# Altium PCB TwoLayer.PcbDoc
Units mm, origin at the board's own origin, x right, y up, seen from the top; angles counter-clockwise.
Board outline 130 x 170 mm, 2 copper layers (Top Layer, Bottom Layer), stack 1.07 mm thick; 24 components, 16 nets, 100 pads, 0 vias.
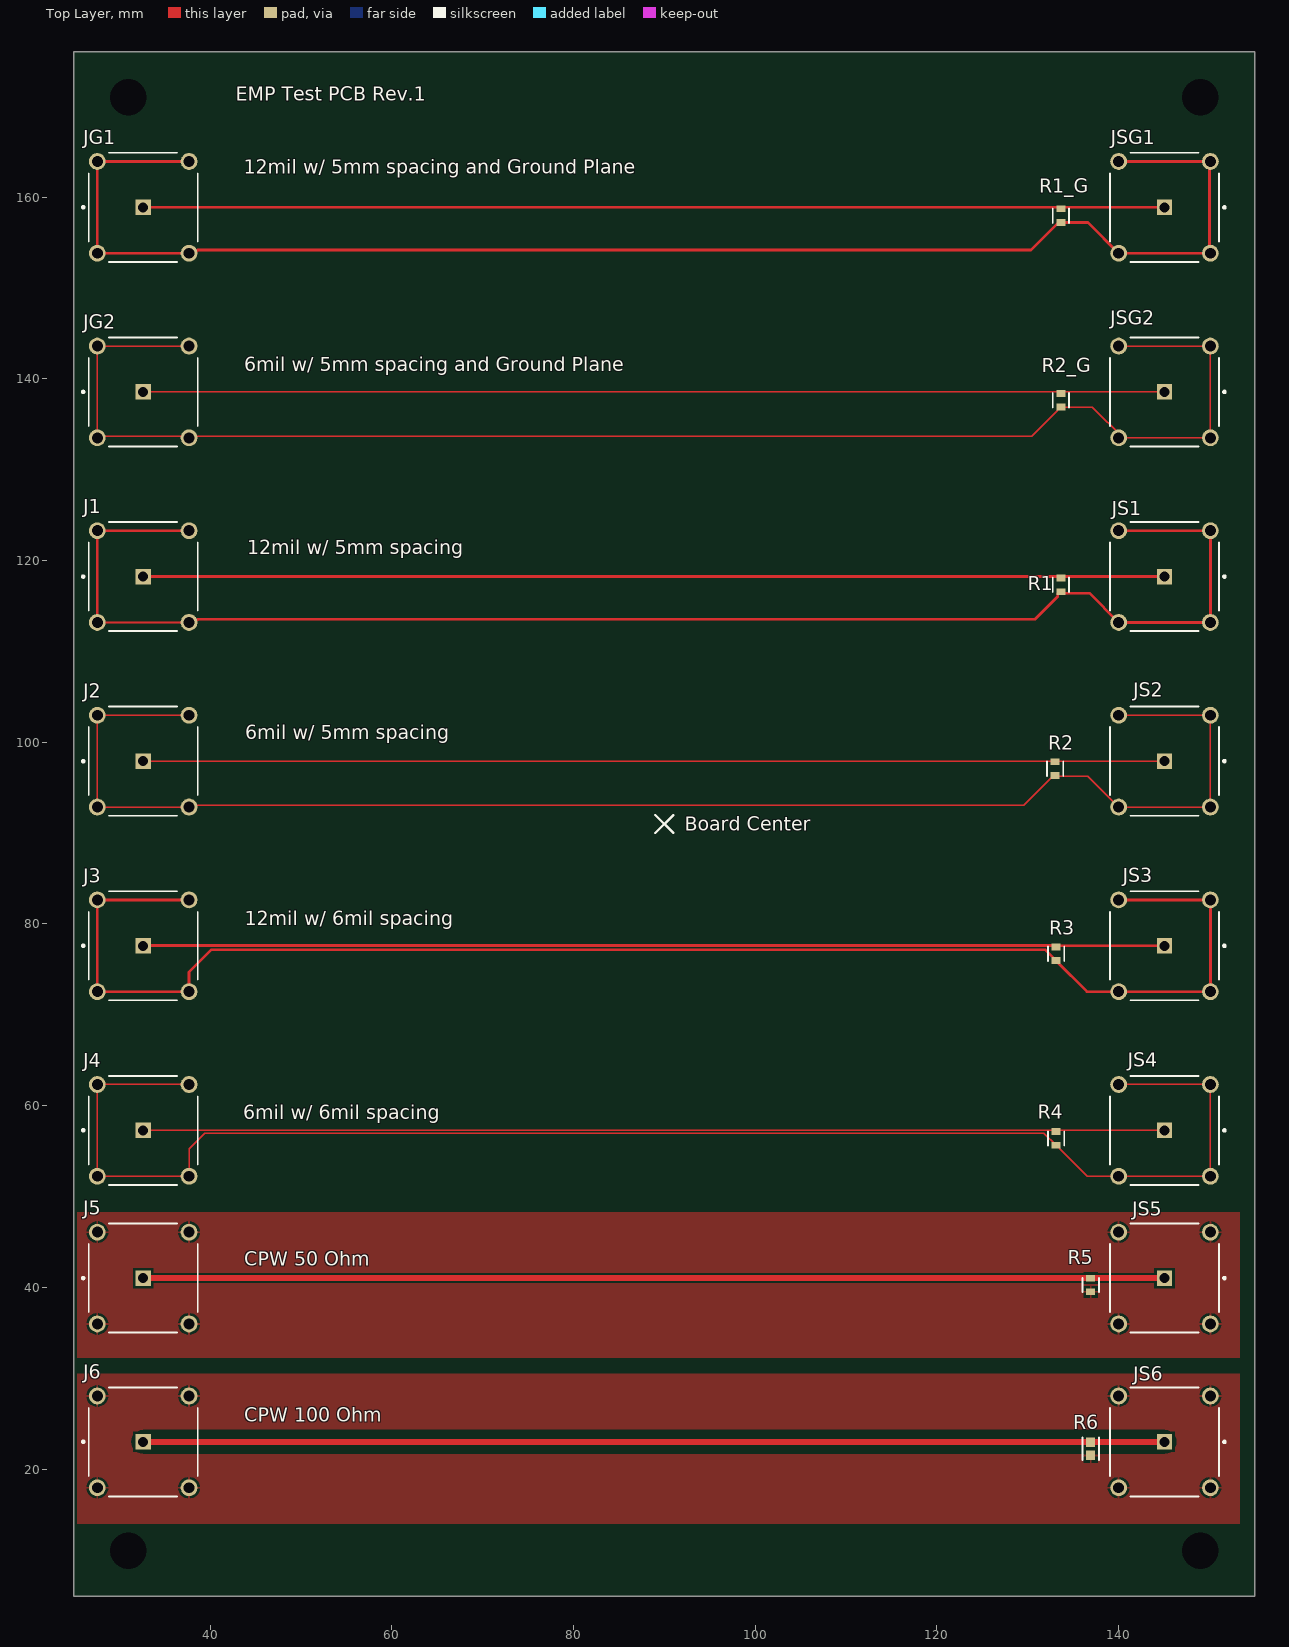
[diagram p0: Top Layer view]
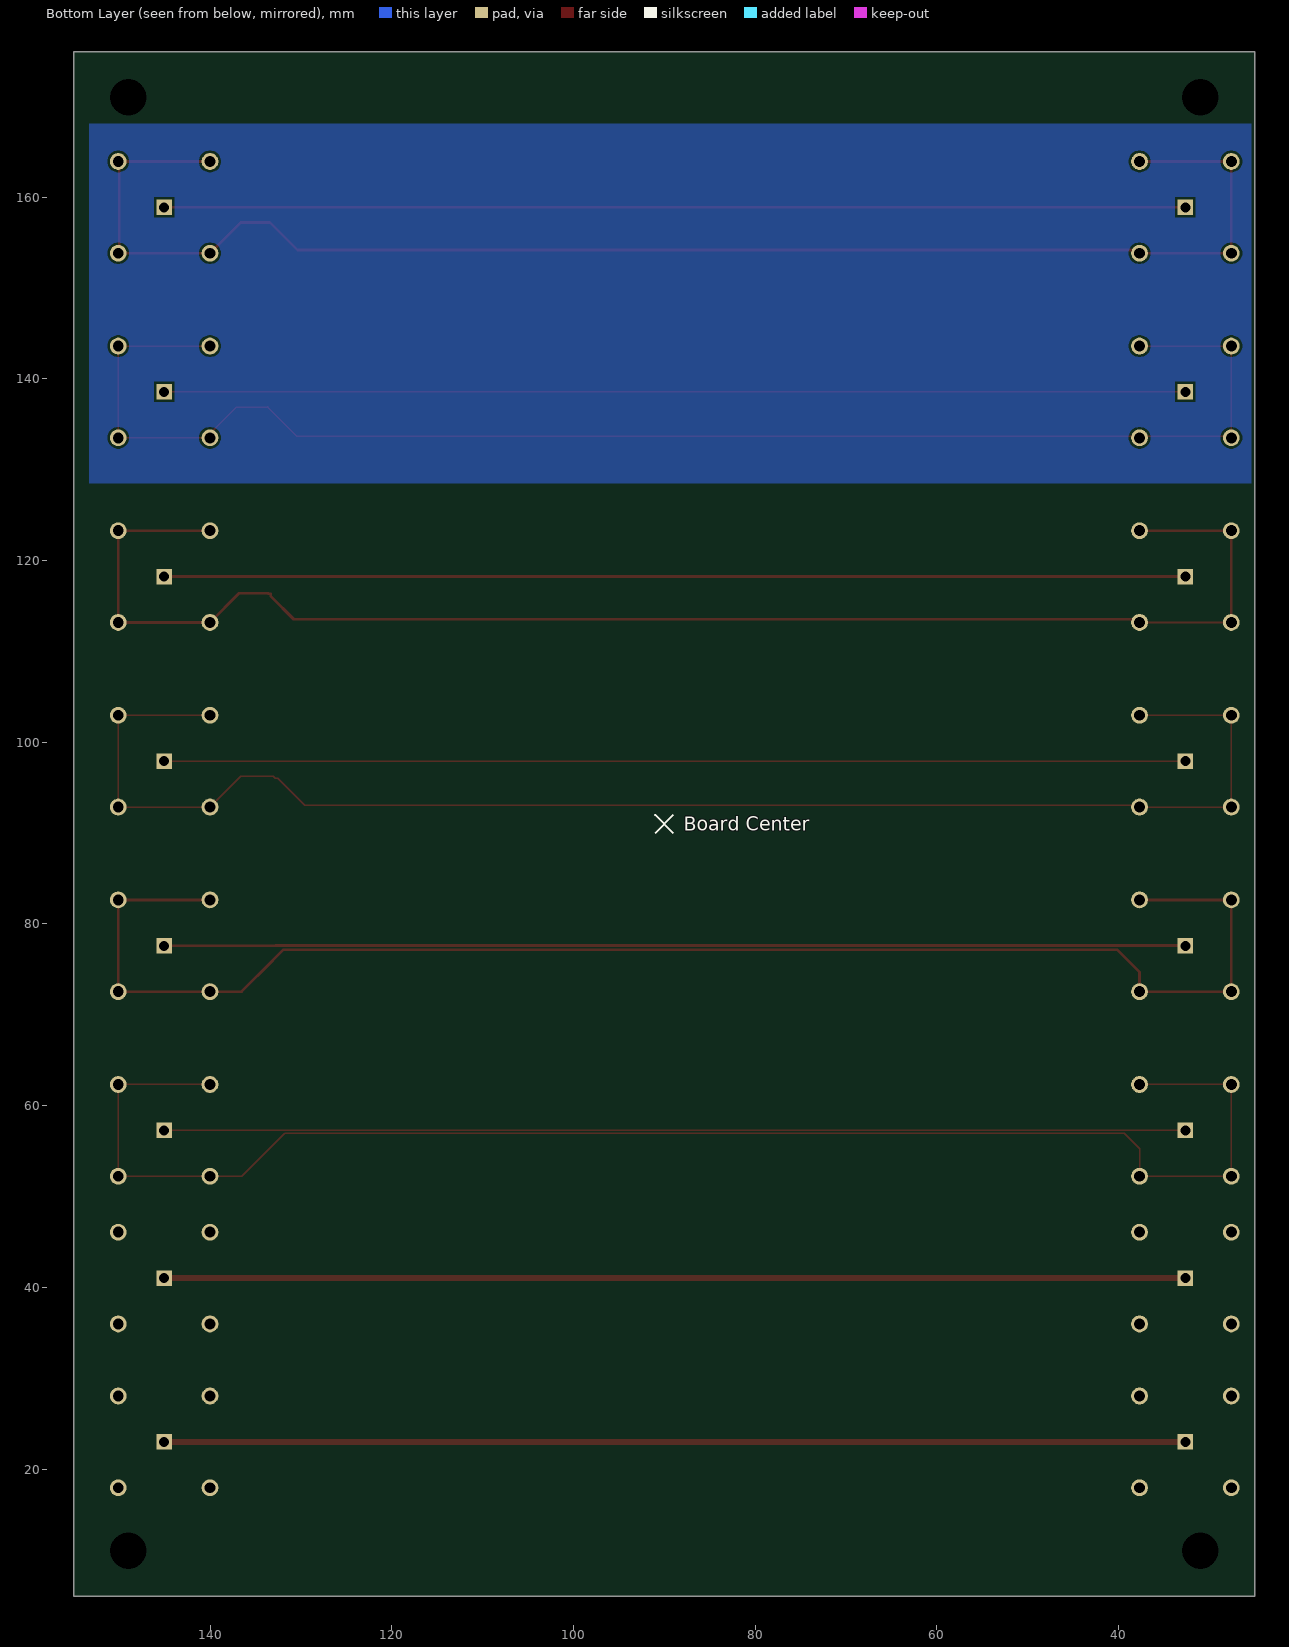
[diagram p1: Bottom Layer view, seen from below]
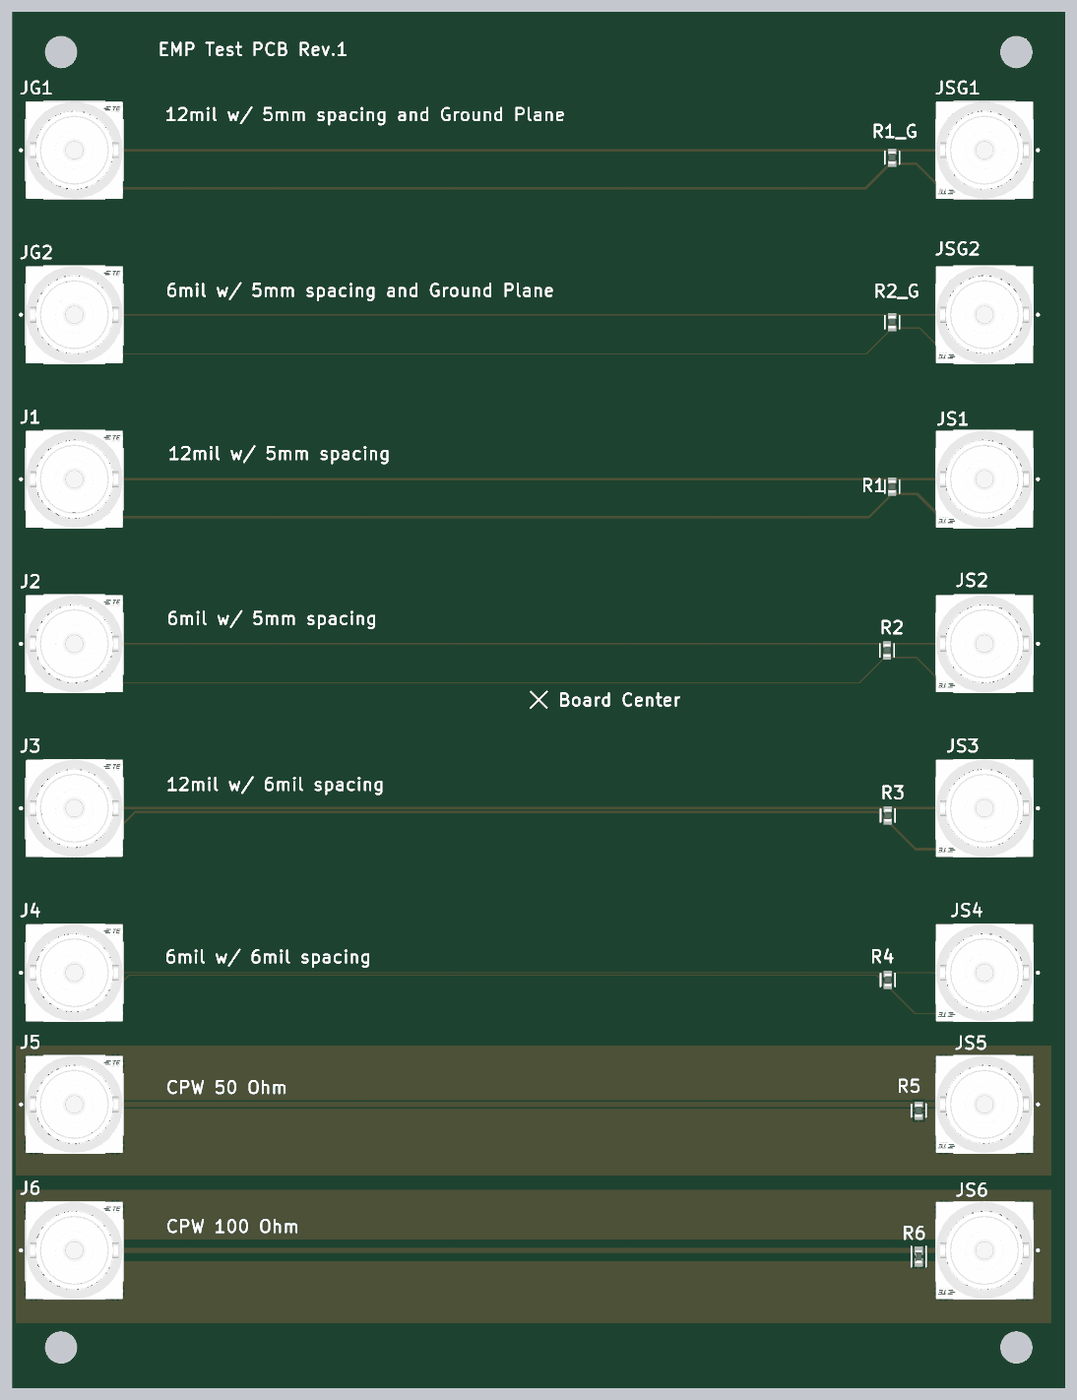
[diagram p2: 3D render of the assembled board from above, using the file's embedded part models]

## Layer stack, top to bottom
Top Solder: solder mask 0.0102, Solder Resist, Dk 3.5
Top Layer: signal copper 0.035
Dielectric 1: prepreg 1, PP-022, Dk 4.5
Bottom Layer: signal copper 0.035
Bottom Solder: solder mask 0.0102, Solder Resist, Dk 3.5

## Board outline
25,6 155,6 155,176 25,176

## Design rules (kind name [scope] priority, off if disabled: settings)
Clearance Clearance_3_4 [InNet('GND3') or InNet('GND4')] p1: gap=0.254 ignorepadtopadclearanceinfootprint=FALSE except(0.152: Arc-Arc Arc-Track Track-Track)
Clearance Clearance_1_2 [InNet('GND1') or InNet('GND2')] p2: gap=0.254 ignorepadtopadclearanceinfootprint=FALSE except(1.524: Arc-Arc Arc-Track Track-Track)
Clearance DIFF_PAIR_5 [InNamedPolygon('SIG5_N_L01_P000')] p3: gap=0.254 ignorepadtopadclearanceinfootprint=FALSE except(0.186: Arc-Fill Arc-Poly Arc-Region Track-Fill Track-Poly Track-Region) // 50Ohm
Clearance DIFF_PAIR_6 [InNamedPolygon('SIG6_N_L01_P002')] p4: gap=0.254 ignorepadtopadclearanceinfootprint=FALSE except(0.991: Arc-Fill Arc-Poly Arc-Region Track-Fill Track-Poly Track-Region) // 100Ohm
Clearance [All] p5: gap=0.254 ignorepadtopadclearanceinfootprint=FALSE
DiffPairsRouting [All] p1: maxlimit=0.254 minlimit=0.254 mostfreqgap=0.254 toplayer_minwidth=0.381 toplayer_maxwidth=0.381 toplayer_prefwidth=0.381 bottomlayer_minwidth=0.381 bottomlayer_maxwidth=0.381 bottomlayer_prefwidth=0.381 maxuncoupledlength=12.7
HoleSize [All] p1: absolutevalues=TRUE maxlimit=4.013 minlimit=0.025 maxpercent=80.000 minpercent=20.000
PolygonConnect [All] p1: connectstyle=Relief reliefconductorwidth=0.254 reliefentries=4 polygonreliefangle="90 Angle" airgapwidth=0.254
RoutingVias [All] p1: holewidth=0.711 width=1.27 viastyle="Through Hole" minholewidth=0.711 minwidth=1.27 maxholewidth=0.711 maxwidth=1.27
SolderMaskExpansion [All] p1: expansion=0.102 istentingtop=FALSE
Width [All] p1: maxlimit=3.175 minlimit=0.152 preferedwidth=0.305 bottomlayer_minwidth=0.254 bottomlayer_maxwidth=0.254 bottomlayer_prefwidth=0.254 minimp=50.000000 maximp=50.000000 favimp=50.000000
28 further rules are at their usual default settings.

## Classes and differential pairs
polygon class PolygonClass_3: SIG3_N_L01_P002
differential pair SIG6: +SIG6_P -SIG6_N
differential pair SIG5: +SIG5_P -SIG5_N

## Components (designator, comment, footprint, x,y, rotation, side; value= is the part's Value field where it differs from the comment)
J1 "1-1337445-0" FP-1-1337445-0-MFG 32.639,118.237 r0 top
J2 "1-1337445-0" FP-1-1337445-0-MFG 32.639,97.917 r0 top
J3 "1-1337445-0" FP-1-1337445-0-MFG 32.639,77.597 r0 top
J4 "1-1337445-0" FP-1-1337445-0-MFG 32.639,57.277 r0 top
J5 "1-1337445-0" FP-1-1337445-0-MFG 32.639,41.021 r0 top
J6 "1-1337445-0" FP-1-1337445-0-MFG 32.639,22.987 r0 top
JG1 "1-1337445-0" FP-1-1337445-0-MFG 32.639,158.877 r0 top
JG2 "1-1337445-0" FP-1-1337445-0-MFG 32.639,138.557 r0 top
JS1 "1-1337445-0" FP-1-1337445-0-MFG 145.059,118.237 r180 top
JS2 "1-1337445-0" FP-1-1337445-0-MFG 145.059,97.917 r180 top
JS3 "1-1337445-0" FP-1-1337445-0-MFG 145.059,77.597 r180 top
JS4 "1-1337445-0" FP-1-1337445-0-MFG 145.059,57.277 r180 top
JS5 "1-1337445-0" FP-1-1337445-0-MFG 145.059,41.021 r180 top
JS6 "1-1337445-0" FP-1-1337445-0-MFG 145.059,22.987 r180 top
JSG1 "1-1337445-0" FP-1-1337445-0-MFG 145.059,158.877 r180 top
JSG2 "1-1337445-0" FP-1-1337445-0-MFG 145.059,138.557 r180 top
R1 "CRCW060350R0FKEA" FP-CRCW0603-e3-MFG 133.655,117.323 r90 top
R1_G "CRCW060350R0FKEA" FP-CRCW0603-e3-MFG 133.655,157.963 r90 top
R2 "CRCW060350R0FKEA" FP-CRCW0603-e3-MFG 133.02,97.092 r90 top
R2_G "CRCW060350R0FKEA" FP-CRCW0603-e3-MFG 133.655,137.643 r90 top
R3 "CRCW060350R0FKEA" FP-CRCW0603-e3-MFG 133.121,76.708 r90 top
R4 "CRCW060350R0FKEA" FP-CRCW0603-e3-MFG 133.121,56.388 r90 top
R5 "CRCW060350R0FKEA" FP-CRCW0603-e3-MFG 136.931,40.259 r90 top
R6 "ERA-3AEB101V" FP-ERA3A-IPC_B 136.931,22.225 r90 top

## Footprints (in the part's own frame and the unit in brackets; to place one, negate y for a bottom-side part, rotate by r counter-clockwise, add the part's x,y. Pads: shape width x height; smd on the part's side, far side on the other; paste and mask are expansions set on the pad)
FP-1-1337445-0-MFG [mm]
  rect 1.7x1.7 hole 1.1 paste-2539.97 mask+0: 1(0,0)
  round 1.85 hole 1.2 paste-2539.97 mask+0: 2(-5.05,5.05) 3(5.05,5.05) 4(-5.05,-5.05) 5(5.05,-5.05)
  silkscreen extent -6.72,-6 6,6, body extent -6.1,-6.1 6.1,6.1, height 0.25
FP-CRCW0603-e3-MFG [mm]
  rect 0.75x1 smd paste+0 mask+0: 1(-0.75,0) 2(0.75,0)
  silkscreen extent -0.8,-0.9 0.8,0.9, body extent -1.22,-0.6 1.22,0.6, height 0.25
FP-ERA3A-IPC_B [mm]
  rect 1.055x1.006 smd paste+0 mask+0: 1(-0.726,0) 2(0.726,0)
  silkscreen extent -1.25,-0.9 1.25,0.9, body extent -1.5,-0.75 1.5,0.75, height 0.25

## Part data
J1 J2 J3 J4 J5 J6 JG1 JG2 JS1 JS2 JS3 JS4 JS5 JS6 JSG1 JSG2: library part CMP-03357-000006-1, "CONN BNC JACK STR 50 OHM PCB", Dielectric Material=PTFE, Frequency=4GHz, Insulation Resistance=5GR, Max Operating Temperature=165°C, Min Operating Temperature=-65°C, Operating Frequency="0 to 4Hz", Package Quantity=50, Body Material=Brass, Body Plating=Silver, Connector Type=BNC, Contact Material=Brass, Contact Plating=Silver, Depth=12mm, ELV=Compliant, Fastening Type=Bayonet, Gender=Female, Impedance=50R, Insulation Material=Polytetrafluoroethylene, Length=12mm, Material=Brass, Max Frequency=4GHz, Mount="Through Hole", Number of Positions=1, Orientation=Straight, Packaging=Bag, PCB Mount Retention=With, PCB Mounting Orientation=Vertical, PCB Thickness=0.126inch, Radiation Hardening=No, RoHS Compliant=Yes, Sealable="No (Without)", Series=BNC, Termination=Solder
R1 R1_G R2 R2_G R3 R4 R5: library part CMP-2000-03436-2, "RES Thick Film, 50Ω, 1%, 0.1W, 100ppm/°C, 0603", Case Code (Imperial)=0603, Case Code (Metric)=1608, Max Operating Temperature=155°C, Min Operating Temperature=-55°C, Package Quantity=5000, Power Rating=100mW, Resistance=50R, Temperature Coefficient=100ppm/°C, Tolerance=1%, Voltage Rating=75V, Case/Package=0603, Composition="Thick Film", Contact Plating=Tin, Depth=0.85mm, Height=0.45mm, Lead Free="Lead Free", Length=1.55mm, Military Standard=Not, Mount="Surface Mount", Number of Pins=2, Packaging="Tape and Reel", Radiation Hardening=No, REACH SVHC="No SVHC", Termination=SMD/SMT, Voltage Rating (DC)=75V, Weight=7.1E-05oz, Width=0.85mm
R6: library part CMP-2000-00870-2, "RES SMD 100 OHM 0.1% 1/10W 0603", Case Code (Imperial)=0603, Case Code (Metric)=1608, Max Operating Temperature=155°C, Max Power Dissipation=100mW, Min Operating Temperature=-55°C, Package Quantity=5000, Resistance=100R, Resistance Tolerance=0.1%, Resistor Type="Thin Film", Temperature Coefficient=25ppm/°C, Voltage Rating=75V, Case/Package=0603, Construction=Rectangular, Contact Plating=Tin, Depth=0.8mm, Height=0.45mm, Length=1.6mm, Military Standard=Not, Mount="Surface Mount", Number of Pins=2, Number of Terminations=2, Packaging="Tape and Reel", Power Rating=100mW, Radiation Hardening=No, REACH SVHC="No SVHC", RoHS Compliant=Yes, Series=ERA-3A, Size Code=0603, Technology="METAL FILM", Termination=SMD/SMT, Tolerance=0.1%, Width=0.8mm

## Free pads (board coordinates)
  round 1.524 hole 4 unplated: 3(31,171) 3(31,11) 3(149,11) 3(149,171)

## Nets (pads, with @x,y where several pads share a name; then routed paths per layer and width w, separated by ;. In a path a pad name is that pad's centre, name@x,y a point inside that pad or via, vN(x,y) a via of type N, cw(c..) or ccw(c..) an arc to the next point about the centre after c; other vN are vias at no path point)
GND1: J1.2 J1.3 J1.4 J1.5 JS1.2 JS1.3 JS1.4 JS1.5 R1.1 | length 165.8
  Top Layer w0.254: J1.5 J1.4 J1.2 J1.3
  Top Layer w0.305: J1.5 37.985,113.483 38.585,113.483 38.64,113.538 130.785,113.538 133.307,116.061 133.307,116.35 133.597,116.35 133.655,116.408 136.788,116.408 JS1.3 JS1.2 JS1.4 JS1.5
GND1_G: JG1.2 JG1.3 JG1.4 JG1.5 JSG1.2 JSG1.3 JSG1.4 JSG1.5 R1_G.1 | length 165.7
  Top Layer w0.254: R1_G.1@133.635,157.232 R1_G.1
  Top Layer w0.305: JG1.3@37.927,163.927 JG1.2 JG1.4 JG1.5 37.985,154.123 38.585,154.123 38.64,154.178 130.37,154.178 133.405,157.213 133.635,157.213 136.624,157.213 JSG1.3 JSG1.2 ; JSG1.5 149.891,163.927 150,163.818 JSG1.2@150,153.936
GND2: J2.2 J2.3 J2.4 J2.5 JS2.2 JS2.3 JS2.4 JS2.5 R2.1 | length 165.7
  Top Layer w0.152: J2.3 J2.2 J2.4 38.148,92.867 38.372,93.091 129.591,93.091 132.543,96.043 132.823,96.043 133.02,96.241 133.121,96.241 136.636,96.241 JS2.3 JS2.2 JS2.4 JS2.5
GND2_G: JG2.2 JG2.3 JG2.4 JG2.5 JSG2.2 JSG2.3 JSG2.4 JSG2.5 R2_G.1 | length 165.7
  Top Layer w0.152: JG2.4 JG2.4@27.589,133.685 ; JG2.5 37.888,133.706 130.454,133.706 133.648,136.899 137.101,136.899 140.493,133.507 JSG2.2 JSG2.4 JSG2.5 ; JG2.5@37.689,133.685 JG2.4@27.589,133.685 ; JG2.3 JG2.2 JG2.4@27.589,133.685
  Top Layer w0.254: R2_G.1@133.648,136.899 R2_G.1
GND3: J3.2 J3.3 J3.4 J3.5 JS3.2 JS3.3 JS3.4 JS3.5 R3.1 | length 167.9
  Top Layer w0.305: J3.3 J3.2 J3.4 J3.5 37.689,74.689 40.165,77.165 131.914,77.165 R3.1 ; R3.1@133.184,75.895 136.532,72.547 JS3.3 JS3.2 JS3.4 JS3.5
GND4: J4.2 J4.3 J4.4 J4.5 JS4.2 JS4.3 JS4.4 JS4.5 R4.1 | length 168.6
  Top Layer w0.152: J4.3 J4.2 J4.4 J4.5 37.694,52.232 37.694,55.27 39.395,56.972 131.75,56.972 ; 131.787,56.972 R4.1 136.532,52.227 JS4.3 JS4.2 JS4.4 JS4.5
SIG5_N: J5.2 J5.3 J5.4 J5.5 JS5.2 JS5.3 JS5.4 JS5.5 R5.1
SIG5_P: J5.1 JS5.1 R5.2 | length 112.3
  Top Layer w0.635: J5.1@32.754,41.021 JS5.1 JS5.1@145.085,41.021
SIG6_N: J6.2 J6.3 J6.4 J6.5 JS6.2 JS6.3 JS6.4 JS6.5 R6.1 | length 0.3
  Top Layer w0.254: JS6.2@149.885,18.161 JS6.2
SIG6_P: J6.1 JS6.1 R6.2 | length 112.4
  Top Layer w0.635: J6.1 136.931,22.987 145.009,22.987 JS6.1
V1: J1.1 JS1.1 R1.2 | length 112.4
  Top Layer w0.305: J1.1 133.655,118.237 JS1.1
V1_G: JG1.1 JSG1.1 R1_G.2 | length 112.4
  Top Layer w0.305: JG1.1 JSG1.1
V2: J2.1 JS2.1 R2.2 | length 112.7
  Top Layer w0.152: J2.1 133.02,97.917 JS2.1 JS2.1@145.339,97.917
V2_G: JG2.1 JSG2.1 R2_G.2 | length 112.7
  Top Layer w0.152: JG2.1 JSG2.1@145.296,138.557
V3: J3.1 JS3.1 R3.2 | length 112.4
  Top Layer w0.305: J3.1 33.337,77.622 132.774,77.622 133.121,77.597 JS3.1
V4: J4.1 JS4.1 R4.2 | length 112.4
  Top Layer w0.152: J4.1 JS4.1

## Polygon pours and split planes (outlines as drawn)
SIG5_N on Top Layer "SIG5_N_L01_P000" (solid, pour order 0): 153.314,48.26 25.4,48.26 25.4,32.258 153.314,32.258
SIG6_N on Top Layer "SIG6_N_L01_P002" (solid, pour order 2): 153.314,30.48 25.4,30.48 25.4,13.97 153.314,13.97
no net on Bottom Layer "SHIELD" (solid, pour order 3): 25.4,168.097 25.4,128.524 153.314,128.524 153.314,168.097

## Silkscreen, mask and mechanical layers (free items; w line width, h text height)
Top Overlay:
  lines w0.254: 89,90 91,92 ; 89,92 91,90
  text "EMP Test PCB Rev.1" at 42.824,170.612 h1.52
  text "12mil w/ 5mm spacing and Ground Plane" at 43.688,162.56 h1.52
  text "6mil w/ 5mm spacing and Ground Plane" at 43.79,140.843 h1.52
  text "12mil w/ 5mm spacing" at 44.069,120.701 h1.52
  text "6mil w/ 5mm spacing" at 43.891,100.33 h1.52
  text "Board Center" at 92.254,90.254 h1.52
  text "12mil w/ 6mil spacing" at 43.84,79.832 h1.52
  text "6mil w/ 6mil spacing" at 43.663,58.521 h1.52
  text "CPW 50 Ohm" at 43.79,42.393 h1.52
  text "CPW 100 Ohm" at 43.79,25.222 h1.52
Bottom Overlay:
  lines w0.152: 91,90 89,92 ; 91,92 89,90 ; 89,90 89,90 ; 89,92 89,92
  lines w0.254: 91,92 91,92
  text "Board Center" at 87.833,90.246 h1.52